# EAGLE board Actuator_control_v9 (EAGLE 9.7.0)
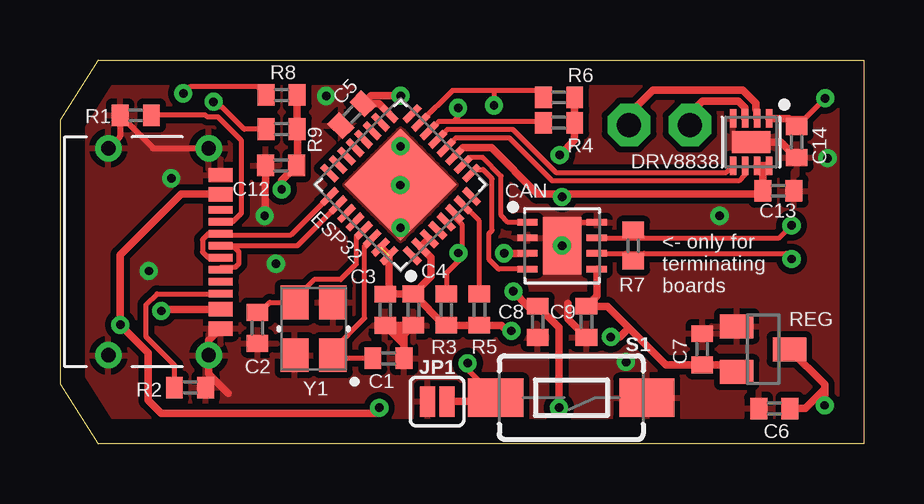
[diagram p0: board, top side]
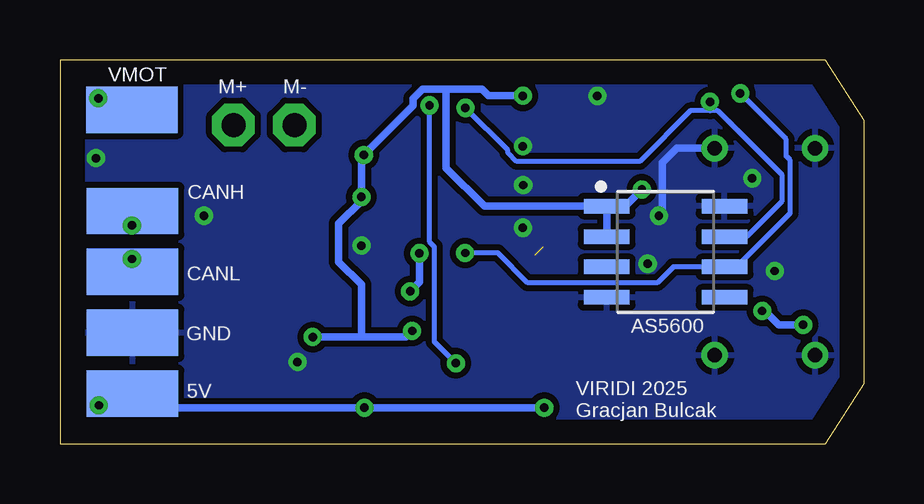
[diagram p1: board, bottom side, seen from below]

Size 33.5 x 16 mm. Coordinates in mm from the lower left corner, seen from the top.
Outline: 1.6,16 33.5,16 33.5,0 1.6,0 0,2.5 0,13.5 1.6,16
Copper layers (1*16): Top 0.035mm / dielectric 1.5mm / Bottom 0.035mm
Design rules "Fusion Electronics Design Rules": minimum track width 6mil, minimum drill 0.35mm, track to track 6mil, track to pad 6mil, pad to pad 6mil, via to via 6mil, smd to smd 6mil, copper to edge 40mil, drill to drill 6mil, minimum pad ring 10mil, minimum via ring 8mil, stop-mask expansion 4mil, vias tented up to drill 0mil, thermal gap 10mil

## Footprints (pad centres in the part's own frame; a part is rotated, then mirrored left to right if it is on the bottom)
SOIC127P600X175-8N = smd 1.915 x 0.605: 1 -2.458,1.905; 2 -2.458,0.635; 3 -2.458,-0.635; 4 -2.458,-1.905; 5 2.458,-1.905; 6 2.458,-0.635; 7 2.458,0.635; 8 2.458,1.905
C0402 = smd 0.7 x 0.9: 1 -0.65,0; 2 0.65,0
SON65P300X300X75-9T160X240N = smd 0.84 x 0.274: 1 -1.446,0.975; 2 -1.446,0.325; 3 -1.446,-0.325; 4 -1.446,-0.975; 5 1.446,-0.975; 6 1.446,-0.325; 7 1.446,0.325; 8 1.446,0.975 | smd 1.6 x 2.4: 9 0,0
SON50P200X200X80-9T90X160N = smd 0.762 x 0.274: 1 -0.985,0.75; 2 -0.985,0.25; 3 -0.985,-0.25; 4 -0.985,-0.75; 5 0.985,-0.75; 6 0.985,-0.25; 7 0.985,0.25; 8 0.985,0.75 | smd 0.9 x 1.6: 9 0,0
ESP32-C3_CHIP = smd 0.862 x 0.274: 1 -2.435,1.75; 2 -2.435,1.25; 3 -2.435,0.75; 4 -2.435,0.25; 5 -2.435,-0.25; 6 -2.435,-0.75; 7 -2.435,-1.25; 8 -2.435,-1.75; 17 2.435,-1.75; 18 2.435,-1.25; 19 2.435,-0.75; 20 2.435,-0.25; 21 2.435,0.25; 22 2.435,0.75; 23 2.435,1.25; 24 2.435,1.75 | smd 0.274 x 0.862: 9 -1.75,-2.435; 10 -1.25,-2.435; 11 -0.75,-2.435; 12 -0.25,-2.435; 13 0.25,-2.435; 14 0.75,-2.435; 15 1.25,-2.435; 16 1.75,-2.435; 25 1.75,2.435; 26 1.25,2.435; 27 0.75,2.435; 28 0.25,2.435; 29 -0.25,2.435; 30 -0.75,2.435; 31 -1.25,2.435; 32 -1.75,2.435 | smd 3.3 x 3.3: 33 0,0
SMT-JUMPER_2_NO_SILK = smd 0.635 x 1.27: 1 -0.406,0; 2 0.406,0
R0402 = smd 0.7 x 0.9: 1 -0.65,0; 2 0.65,0
SOT23 = smd 1 x 1.4: 1 -0.95,-1.1; 2 0.95,-1.1; 3 0,1.1
TACTILE_SWITCH_SMD_6.0X3.5MM = smd 2.3 x 1.6: 1 -3.15,0; 2 3.15,0
USB-CMOLEX = smd 0.3 x 1: CC1 -1.25,0.5; CC2 1.75,0.5; DN1 0.25,0.5; DN2 -0.75,0.5; DP1 -0.25,0.5; DP2 0.75,0.5; SBU1 1.25,0.5; SBU2 -1.75,0.5 | smd 0.6 x 1: GND1 -3.2,0.5; GND2 3.2,0.5; VBUS1 -2.4,0.5; VBUS2 2.4,0.5 | drill 0.6 pad 1 slot 1.7 rotated 90: SH1 -4.32,0; SH4 4.32,0 | drill 0.6 pad 1 slot 1.4 rotated 90: SH2 -4.32,-4.18; SH3 4.32,-4.18
BREAKOUT_4_SMD_2.54 = smd 1.93 x 3.81: P$1 3.81,0; P$2 1.27,0; P$3 -1.27,0; P$4 -3.81,0
BREAKOUT_1_SMD_2.54 = smd 1.93 x 3.81: P$1 0,0
BREAKOUT_2_THT = drill 1 pad 1.778 octagon: P$1 1.27,0; P$2 -1.27,0
WE-XTAL_CFPX-180 = smd 1.4 x 1.15: 1 -1.1,-0.8; 2 1.1,-0.8; 3 1.1,0.8; 4 -1.1,0.8

## Placement (x,y rotation side)
AS5600  AS5600  [SOIC127P600X175-8N]  8.25,8 0 bottom
C1  10pF  [C0402]  13.69,3.55 180 top
C2  10pF  [C0402]  8.23,4.83 90 top
C3  10uF  [C0402]  13.56,5.58 270 top
C4  0.1uF  [C0402]  14.74,5.59 270 top
C5  0.1uF  [C0402]  12.17,13.71 45 top
C6  1uF  [C0402]  29.78,1.47 180 top
C7  1uF  [C0402]  26.77,3.94 90 top
C8  1uF  [C0402]  19.92,5.08 270 top
C9  1uF  [C0402]  21.95,5.08 90 top
C12  100nF  [C0402]  9.22,11.6 180 top
C13  0.1uF  [C0402]  29.95,10.54 180 top
C14  0.1uF  [C0402]  30.71,12.57 270 top
CAN  CAN_TRNSC  [SON65P300X300X75-9T160X240N]  20.93,8.25 0 top
DRV8838  DRV8838  [SON50P200X200X80-9T90X160N]  28.81,12.57 270 top
ESP32  ESP32-C3CHIP  [ESP32-C3_CHIP]  14.2,10.79 135 top
JP1  JUMPER-SMT_2_NO_SILK  [SMT-JUMPER_2_NO_SILK]  15.72,1.75 0 top
R1  5.1k  [R0402]  3.16,13.69 180 top
R2  5.1k  [R0402]  5.42,2.34 180 top
R3  10k  [R0402]  16.11,5.59 90 top
R4  10k  [R0402]  20.8,13.38 180 top
R5  10k  [R0402]  17.49,5.59 90 top
R6  10k  [R0402]  20.8,14.43 0 top
R7  120  [R0402]  23.9,8.25 270 top
R8  5.1k  [R0402]  9.24,14.53 0 top
R9  5.1k  [R0402]  9.24,13.11 0 top
REG  [SOT23]  29.31,3.94 270 top
S1  MOMENTARY-SWITCH-SPST-SMD-6.0X3.5MM  [TACTILE_SWITCH_SMD_6.0X3.5MM]  21.31,1.92 180 top
U$3  USB-CMOLEX  [USB-CMOLEX]  6.2,8 270 top
U$6  BREAKOUT_44-SMD2.54  [BREAKOUT_4_SMD_2.54]  30.47,5.89 270 bottom
U$7  BREAKOUT_11-SMD-2.54  [BREAKOUT_1_SMD_2.54]  30.5,13.92 270 bottom
U$8  BREAKOUT_22-THT  [BREAKOUT_2_THT]  25,13.29 0 top
Y1  16MHz  [WE-XTAL_CFPX-180]  10.58,4.79 90 top

## Library data of the parts
AS5600 CAN DRV8838 U$3 U$6-U$8 = General custom parts
C1-C9 C12-C14 R1-R9 = resistor
ESP32 = ESP32-C3 CHIP
JP1 = SparkFun-Jumpers
REG = v-reg
S1 = SparkFun-Switches; PROD_ID: SWCH-14278; SF_SKU: COM-08229
Y1 = Wurth_Quartz Crystals & Oscillators_WE-XTAL; C-LOAD: 16pF; DATASHEET-URL: https://www.we-online.com/catalog/datasheet/830035264.pdf; MOUNT: SMT; PART-NUMBER: 830035264; STABILITY: 50ppm; TOLERANCE: ±50ppm

## Nets
+3V3: AS5600.1 AS5600.2 C3.1 C4.1 C5.2 C7.1 C9.2 C12.1 C13.2 CAN.5 DRV8838.7 DRV8838.8 ESP32.2 ESP32.3 ESP32.11 ESP32.17 ESP32.31 ESP32.32 R3.1 R4.1 R5.1 R6.2 R8.2 R9.2 REG.2
+VUSB: C6.1 C8.1 CAN.3 REG.3 U$3.VBUS1 U$3.VBUS2 U$6.P$1
CANH: CAN.7 R7.1 U$6.P$4
CANL: CAN.6 R7.2 U$6.P$3
EN: ESP32.7 R5.2
GND: AS5600.4 AS5600.8 C1.1 C2.1 C3.2 C4.2 C5.1 C6.2 C7.2 C8.2 C9.1 C12.2 C13.1 C14.2 CAN.2 CAN.8 CAN.9 DRV8838.4 DRV8838.9 ESP32.33 JP1.1 R1.2 R2.1 REG.1 S1.1 U$3.GND1 U$3.GND2 U$3.SH1 U$3.SH2 U$3.SH3 U$3.SH4 U$6.P$2 Y1.2 Y1.4
GPIO2: AS5600.6 ESP32.6 R3.2 R8.1
GPIO4: CAN.4 ESP32.9
GPIO5: CAN.1 ESP32.10
GPIO6: DRV8838.6 ESP32.12
GPIO7: DRV8838.5 ESP32.13
GPIO8: AS5600.7 ESP32.14 R4.2 R9.1
GPIO9: ESP32.15 JP1.2 R6.1 S1.2
N$1: R1.1 U$3.CC1
N$2: R2.2 U$3.CC2
N$3: DRV8838.3 U$8.P$1
N$4: DRV8838.2 U$8.P$2
OUT: AS5600.3
PGO: AS5600.5
USB_N: ESP32.25 U$3.DN1 U$3.DN2
USB_P: ESP32.26 U$3.DP1 U$3.DP2
VMOT: C14.1 DRV8838.1 U$7.P$1
XTAL_N: C2.2 ESP32.29 Y1.3
XTAL_P: C1.2 ESP32.30 Y1.1

## Tracks (layer width: path | path; a pad name or v marks a point on that pad's centre or on a via)
+3V3  (via drill 0.35 pad 0.4)  (1 unrouted)
  Top 0.2: 9.9,11.56 C12.1
  Top 0.305: DRV8838.8 29.31,11.59 | 29.31,11.59 DRV8838.7 | 29.31,11.59 29.3,11.57 C13.2 29.17,10.41 20.93,10.41 | CAN.5 22.38,6.16 C9.2 22.82,5.73 23.73,4.83 | REG.2 27.91,3.29 C7.1 25.27,3.29 23.73,4.83 | ESP32.17 13.29,14.18 C5.2 12.96,14.51 v14.2,14.51 | ESP32.31 ESP32.32 13.72,6.39 C3.1 C4.1 | ESP32.3 ESP32.2 15.47,7.76 15.47,6.97 C4.1 | C4.1 16.04,4.94 R3.1 R5.1 18.41,4.94 18.65,4.7 v18.82,4.7 | R6.2 R4.1 21.45,12.66 v20.84,12.04 | 20.93,10.41 19.92,10.41 17.99,12.34 16.89,12.34 | 23.73,4.83 23.34,4.44 v22.96,4.44 | 20.93,10.41 v20.93,10.29 | ESP32.11 16.81,12.34 16.89,12.34 | 16.89,12.34 | 9.9,11.56 R9.2 R8.2 | C12.1 9.24,10.97 v9.24,10.6
  Bottom 0.305: v22.96,4.44 20.93,4.44 | 20.93,4.44 20.93,6.63 21.88,7.58 21.88,9.18 20.93,10.12 v20.93,10.29 20.93,11.94 v20.84,12.04 18.77,14.1 18.77,14.39 18.38,14.79 17.4,14.79 | AS5600.2 AS5600.1 | 20.93,4.44 19.07,4.44 v18.82,4.7 | v14.2,14.51 15.63,14.51 15.91,14.79 17.4,14.79 | AS5600.1 15.8,9.9 17.4,11.5 17.4,14.79 | AS5600.1 9.93,9.9 v9.24,10.6
+VUSB  (via drill 0.35 pad 0.4)
  Top 0.305: v18.9,6.35 19.52,5.73 C8.1 20.8,4.84 v20.8,1.49 | v13.31,1.49 13.31,1.4 13.18,1.27 4.21,1.27 3.68,1.8 3.68,3.79 v2.52,4.95 2.52,7.87 5.04,10.4 U$3.VBUS1 | REG.3 31.88,2.47 31.88,2.27 | CAN.3 v18.53,7.93 v18.52,7.94 | 31.88,2.27 v31.88,1.59 | U$3.VBUS2 6.69,5.59 4.28,5.59 v4.22,5.53 | 31.88,2.27 31.08,1.47 C6.1
  Bottom 0.305: v2.52,4.95 3.53,4.95 4.11,5.53 v4.22,5.53 | v13.31,1.49 v20.8,1.49 31.78,1.49 v31.88,1.59 31.4,2.08 U$6.P$1 | v18.9,6.35 18.52,6.73 v18.52,7.94
CANH  (via drill 0.35 pad 0.4)
  Top 0.2: CAN.7 24.34,8.58 | CAN.7 23.57,8.58 R7.1 | CAN.7 29.98,8.58 v30.5,9.1
  Bottom 0.2: v30.5,9.1 30.5,9.68 U$6.P$4
CANL  (via drill 0.35 pad 0.4)
  Top 0.2: CAN.6 24.34,7.93 | CAN.6 23.57,7.93 R7.2 | CAN.6 30.27,7.93 v30.5,7.7
  Bottom 0.2: v30.5,7.7 30.5,7.19 U$6.P$3
EN
  Top 0.2: ESP32.7 17.48,9.28 R5.2
GND  (via drill 0.35 pad 0.4)
  Top 0.2: CAN.8 21.53,9.23 20.93,8.63 CAN.9
  Top 0.254: U$3.SH2 2.51,12.81 R1.2 3.88,12.32 U$3.SH1
  Top 0.305: DRV8838.9 30.06,12.57 C14.2 | C3.2 C4.2 14.34,4.54 | 14.34,4.54 C1.1 14.34,4.14 C3.2 | C3.2 13.96,4.93 14.34,4.54 | C9.1 21.19,5.19 21.19,5.84 | U$3.GND2 6.2,4.3 U$3.SH4 6.2,2.9 7,2.1 | C12.2 8.57,10.89 8.56,10.88 8.56,9.53 v8.53,9.5
  Bottom 0.305: U$3.SH1 7.78,12.32 8.39,11.71 8.39,9.64 v8.53,9.5
  other vias: 14.19,10.78 20.93,8.25 23.6,3.4 11.1,14.5 14.2,12.4 14.2,9 27.5,9.5 32,11.9 4.64,11.06 9,7.5 3.7,7.2
  pour Top (isolate 0.254): 1.64,0.08 33.42,0.08 33.42,15.92 1.64,15.92 0.08,13.48 0.08,2.52
  pour Bottom (isolate 0.254): 1.64,0.08 33.42,0.08 33.42,15.92 1.64,15.92 0.08,13.48 0.08,2.52
GPIO2  (via drill 0.35 pad 0.4)
  Top 0.2: ESP32.6 16.45,9.45 16.75,9.15 16.75,8.01 | 16.75,8.01 16.75,7.76 16.11,7.11 R3.2 | 16.75,8.01 16.7,7.95 v16.61,7.95 | R8.1 8.24,14.88 5.42,14.88 v5.14,14.61
  Bottom 0.2: v16.61,7.95 15.25,7.95 14,6.7 8.6,6.7 7.93,7.37 AS5600.6 5.3,7.37 3.06,9.61 3.06,11.82 3.23,11.99 3.23,12.69 v5.14,14.61
GPIO4
  Top 0.2: ESP32.9 17.31,11.43 17.63,11.43 18.01,11.05 18.01,8.89 17.89,8.77 17.89,7.68 18.29,7.28 CAN.4
GPIO5
  Top 0.2: CAN.1 18.69,9.23 18.39,9.52 18.39,11.16 17.62,11.93 17.11,11.93 ESP32.10
GPIO6
  Top 0.2: DRV8838.6 28.56,11.21 28.3,10.95 20.53,10.95 18.74,12.74 16.5,12.74 ESP32.12
GPIO7
  Top 0.2: DRV8838.5 27.78,11.31 20.67,11.31 18.88,13.09 16.15,13.09 ESP32.13
GPIO8  (via drill 0.35 pad 0.4)
  Top 0.2: ESP32.14 15.79,13.45 16.43,13.45 | R4.2 20.09,13.45 16.43,13.45 | 16.43,13.45 16.6,13.62 v16.6,14 | v6.4,14.25 6.61,14.04 6.76,14.04 7.69,13.11 R9.1
  Bottom 0.2: 6.4,13.88 6.07,13.88 3.41,11.22 3.41,10.1 4.87,8.63 AS5600.7 | 6.4,13.88 7.23,13.88 9.33,11.77 14.46,11.77 14.83,12.14 14.83,12.23 v16.6,14 | v6.4,14.25 6.4,13.88
GPIO9  (via drill 0.35 pad 0.4)
  Top 0.2: ESP32.15 16.36,14.72 18.09,14.72 | R6.1 19.87,14.72 18.09,14.72 | S1.2 17,3.08 v17,3.35 | 18.09,14.72 v18.09,14.1
  Top 0.305: JP1.2 18,1.75 S1.2
  Bottom 0.2: v18.09,14.1 18.09,8.41 17.89,8.2 17.89,4.24 v17,3.35
N$1
  Top 0.2: U$3.CC1 7.21,9.25 7.56,9.6 7.56,12.65 6.59,13.62 6.14,13.62 6.07,13.69 R1.1
N$2
  Top 0.2: U$3.CC2 4.05,6.25 3.59,5.79 3.59,4.45 4.78,3.26 4.78,2.35 R2.2
N$3
  Top 0.305: DRV8838.3 28.56,14.01 28.29,14.27 26.77,14.27 26.27,13.77 U$8.P$1
N$4
  Top 0.305: U$8.P$2 23.73,13.74 24.71,14.73 28.48,14.73 29.02,14.19 29.02,13.92 29.06,13.88 DRV8838.2
USB_N
  Top 0.2: ESP32.25 9.63,8.7 6.7,8.7 U$3.DN2 6.2,8.75 5.95,8.51 5.95,8 6.2,7.75 U$3.DN1 | ESP32.25
USB_P
  Top 0.2: ESP32.26 9.89,8.25 U$3.DP1 6.7,8.2 7.26,8.2 7.45,8.01 7.45,7.5 7.31,7.35 6.7,7.35 U$3.DP2 | ESP32.26
VMOT  (via drill 0.35 pad 0.4)
  Top 0.2: v31.9,14.4 31.06,13.56 DRV8838.1
  Top 0.305: DRV8838.1 30.38,13.56 C14.1
  Bottom 0.2: v31.9,14.4 30.98,14.4 U$7.P$1
XTAL_N
  Top 0.152: C2.2 8.33,5.47
  Top 0.2: 8.33,5.47 8.74,5.89 Y1.3 9.78,6.02 10.6,6.84 11.71,6.84 12.35,7.49 12.35,8.12 12.35,8.13 12.35,8.27 12.35,8.63 12.61,8.9 ESP32.29
XTAL_P
  Top 0.152: 12.71,8.26 12.99,8.54 ESP32.30
  Top 0.2: C1.2 11.51,3.55 Y1.1 11.38,3.91 12.71,5.24 12.71,8.26 ESP32.30

## Text on the board
tPlace: <- only for / terminating / boards
bPlace: M- | M+ | VMOT | CANH | CANL | GND | 5V | VIRIDI 2025 / Gracjan Bulcak